# Altium PCB PCB1.PcbDoc
Units mm, origin at the board's own origin, x right, y up, seen from the top; angles counter-clockwise.
Board outline 84.45 x 34.67 mm, 4 copper layers (Top Layer (SIG), Layer 2 (GND), Layer 3 (PWR), Bottom Layer (SIG)), stack 0.603 mm thick; 34 components, 26 nets, 130 pads, 29 vias.
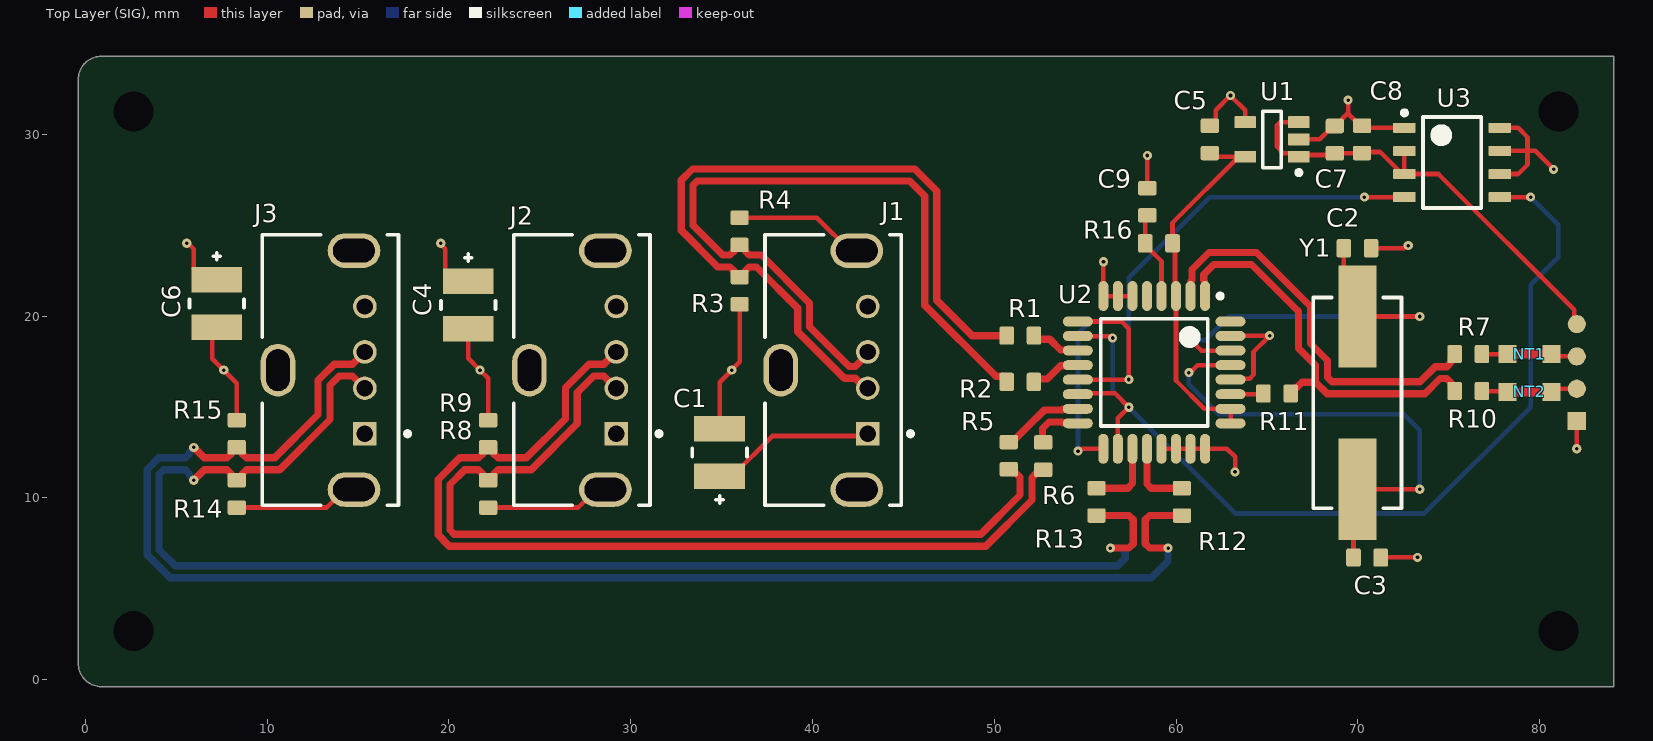
[diagram p0: Top Layer (SIG) view]
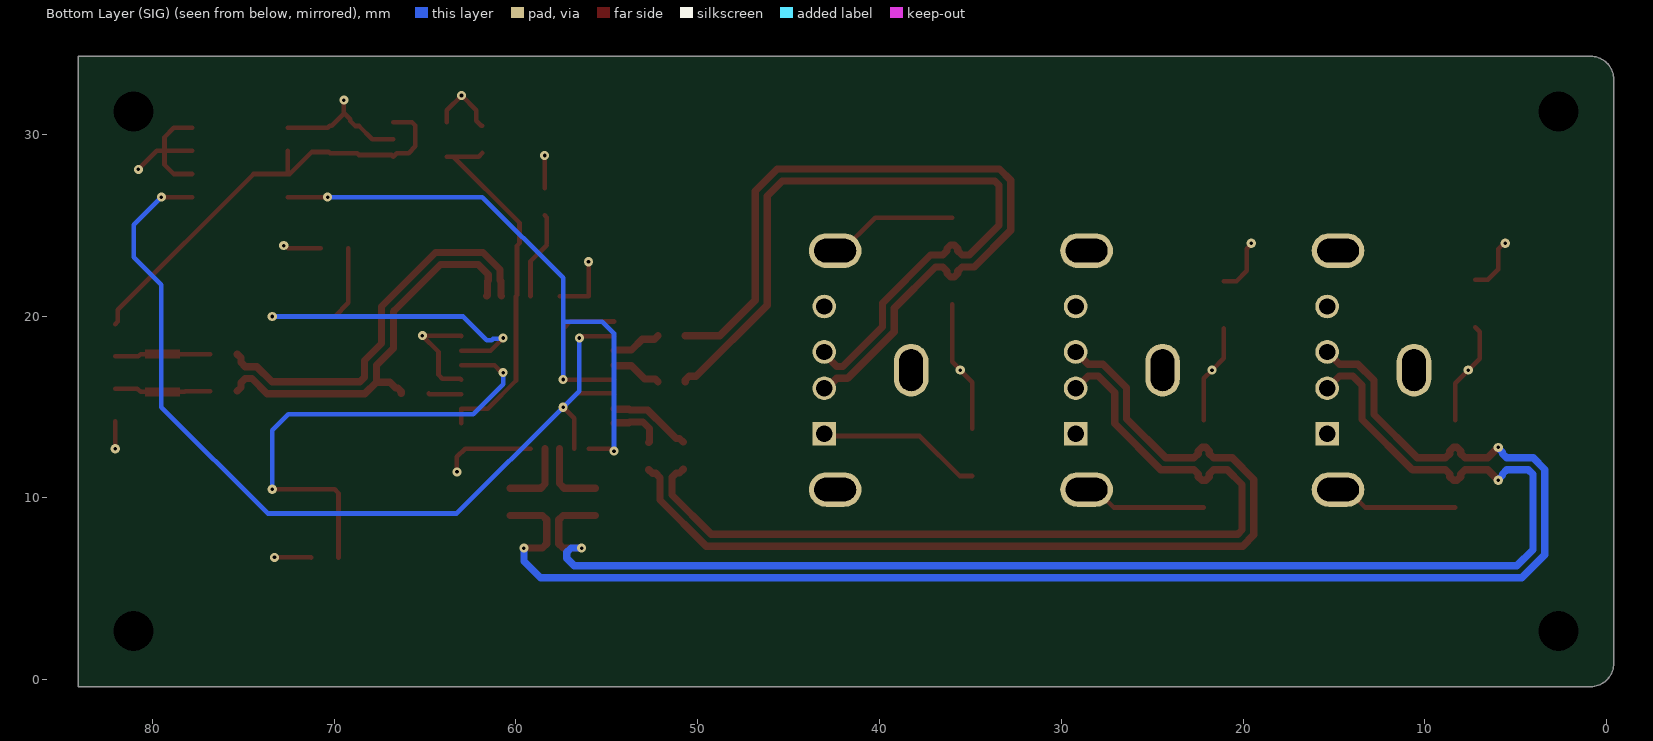
[diagram p1: Bottom Layer (SIG) view, seen from below]
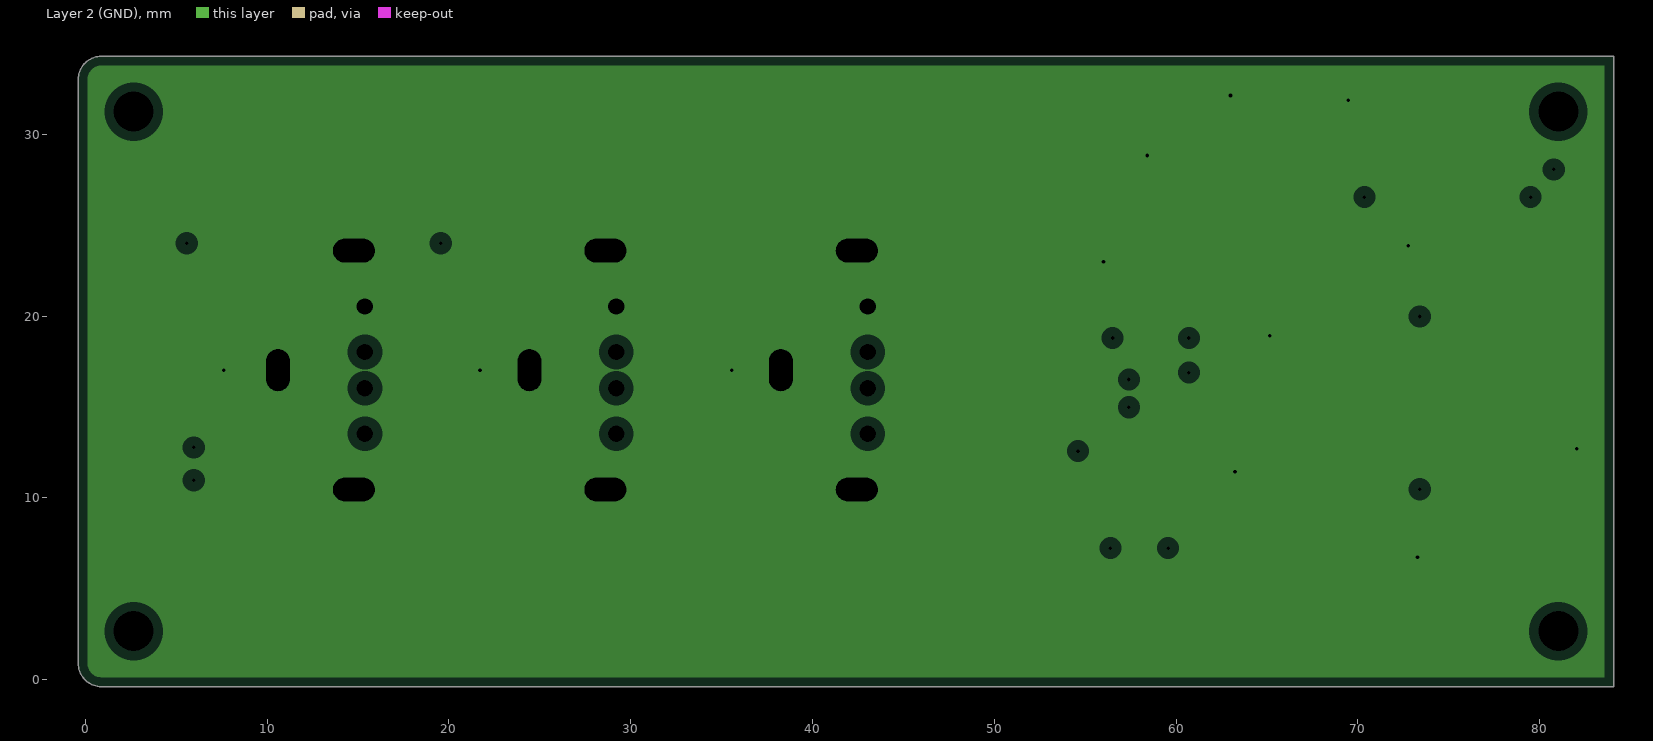
[diagram p2: Layer 2 (GND), clearances drawn from the general rule]
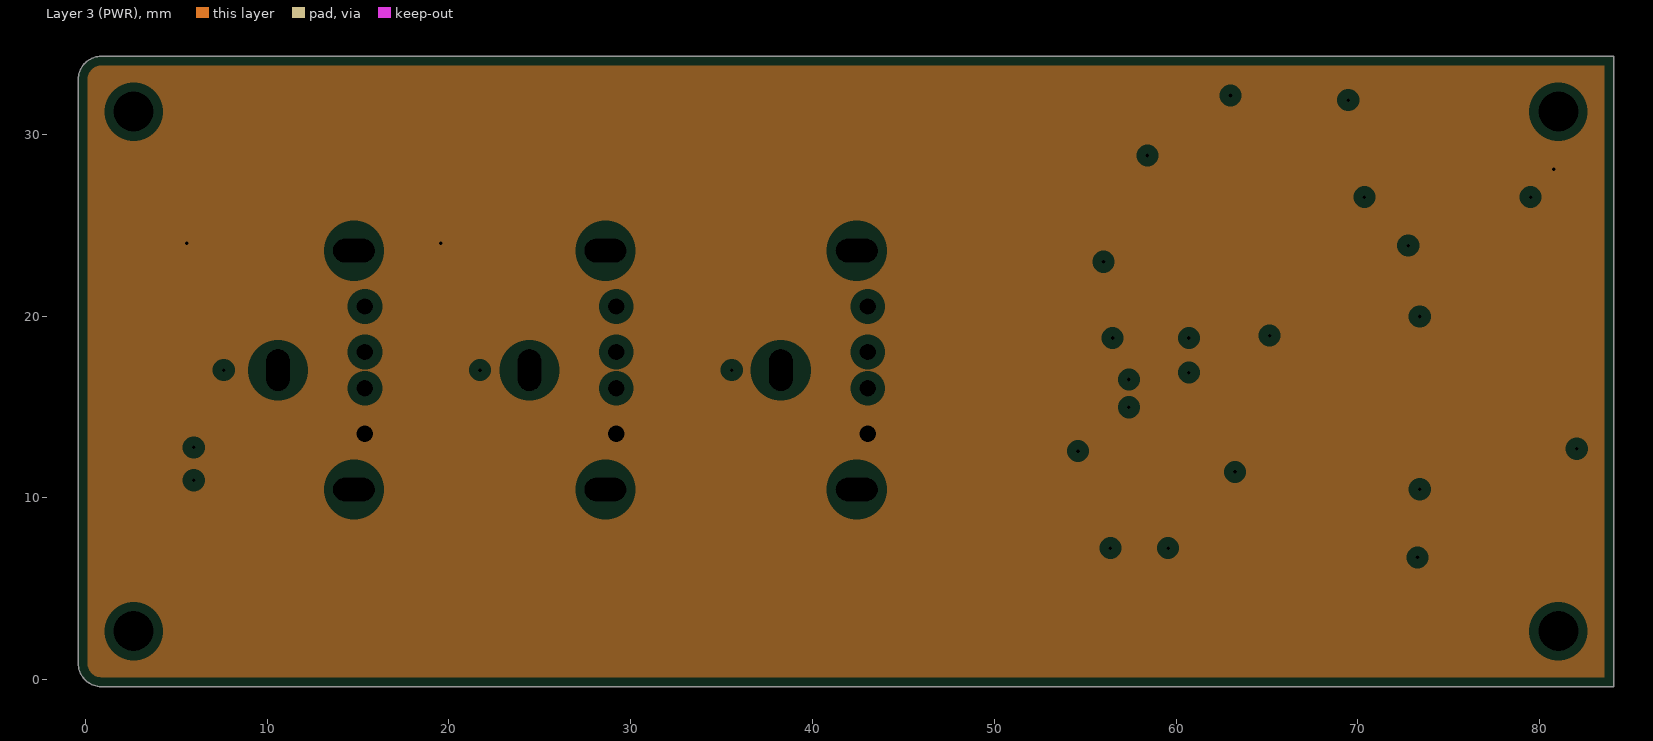
[diagram p3: Layer 3 (PWR), clearances drawn from the general rule]
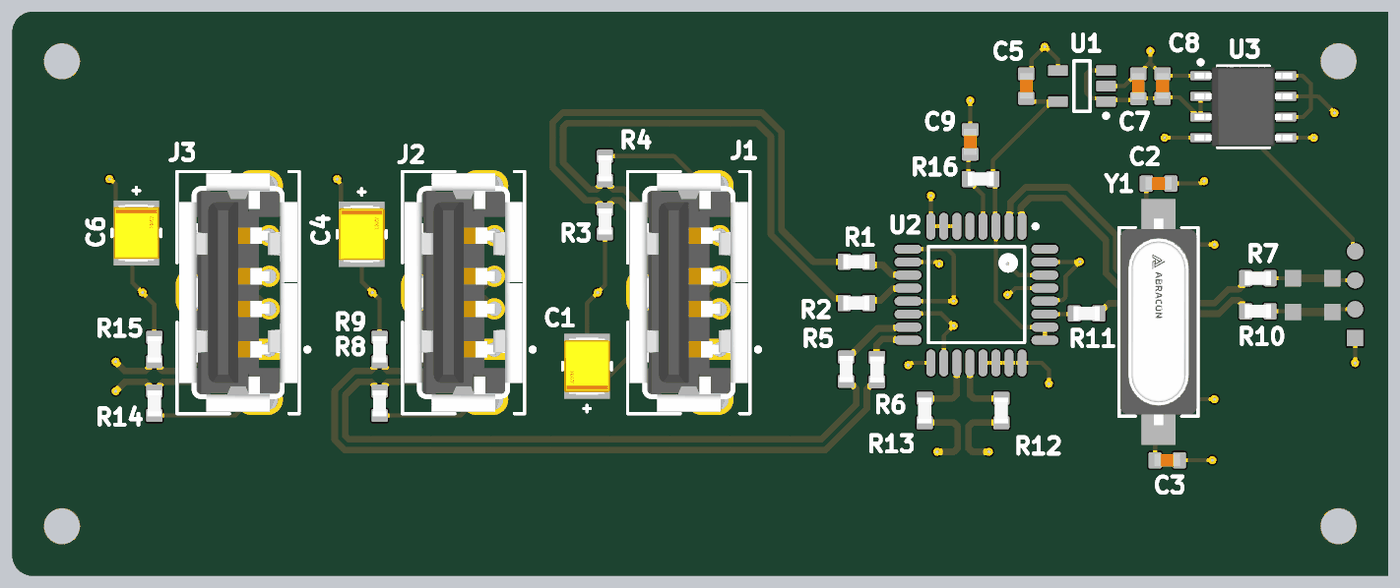
[diagram p4: 3D render of the assembled board from above, using the file's embedded part models]

## Layer stack, top to bottom
Top Solder: solder mask 0.0102, Solder Resist, Dk 3.5
Top Layer (SIG): signal copper 0.0356
Dielectric 2: prepreg 0.0711, PP-006, Dk 4.1
Layer 2 (GND): plane copper 0.035, net GND
Dielectric 1: dielectric 0.32, FR-4, Dk 4.8
Layer 3 (PWR): plane copper 0.035, net 5V_protected
Dielectric 3: prepreg 0.0711, PP-006, Dk 4.1
Bottom Layer (SIG): signal copper 0.0356
Bottom Solder: solder mask 0.0102, Solder Resist, Dk 3.5

## Board outline
-0.381,0.889 ccw(c0.889,0.889) 0.889,-0.381 84.074,-0.381 84.074,34.29 0.762,34.29 0.889,34.29 ccw(c0.889,33.02) -0.381,33.02

## Design rules (kind name [scope] priority, off if disabled: settings)
Clearance [All] p1: gap=0.254 ignorepadtopadclearanceinfootprint=TRUE
DiffPairsRouting [All] p1: maxlimit=0.4 minlimit=0.2 mostfreqgap=0.254 toplayer_minwidth=0.3 toplayer_maxwidth=0.6 toplayer_prefwidth=0.4 bottomlayer_minwidth=0.3 bottomlayer_maxwidth=0.6 bottomlayer_prefwidth=0.4 maxuncoupledlength=12.7
PlaneClearance [All] p1: clearance=0.508
PlaneConnect [All] p1: planeconnectstyle=Relief reliefexpansion=0.508 reliefentries=4 reliefconductorwidth=0.254 reliefairgap=0.254
PolygonConnect [All] p1: connectstyle=Relief reliefconductorwidth=0.254 reliefentries=4 polygonreliefangle="90 Angle" airgapwidth=0.254
RoutingVias [All] p1: holewidth=0.711 width=1.27 viastyle="Through Hole" minholewidth=0.711 minwidth=1.27 maxholewidth=0.711 maxwidth=1.27
SolderMaskExpansion [All] p1: expansion=0.102 istentingtop=FALSE
SupplyNets "Schematic Supply Nets_3" [InNet('5V_protected')] p1: voltage=0.000
SupplyNets "Schematic Supply Nets_2" [InNet('VCC_3V3')] p2: voltage=0.000
SupplyNets "Schematic Supply Nets_1" [InNet('+5')] p3: voltage=0.000
SupplyNets "Schematic Supply Nets" [InNet('GND')] p4: voltage=0.000
Width [All] p1: maxlimit=0.254 minlimit=0.254 preferedwidth=0.254
27 further rules are at their usual default settings.

## Classes and differential pairs
differential pair D31: +D31_P -D31_N
differential pair D21: +D21_P -D21_N
differential pair D11: +D11_P -D11_N
differential pair D3: +D3_P -D3_N
differential pair D2: +D2_P -D2_N
differential pair D1: +D1_P -D1_N
differential pair D0: +D0_P -D0_N

## Components (designator, comment, footprint, x,y, rotation, side; value= is the part's Value field where it differs from the comment)
C1 "100uF" FP-TPSB-MFG 34.898,12.502 r270 top
C2 "33pF" CAP_0603 69.977,23.73 r180 top
C3 "33pF" CAP_0603 70.51,6.718 r180 top
C4 "100uF" FP-TPSB-MFG 21.068,20.614 r90 top
C5 "4.7uF" CAP_0603 61.857,29.718 r270 top
C6 "100uF" FP-TPSB-MFG 7.238,20.692 r90 top
C7 "4.7uF" CAP_0603 68.734,29.705 r270 top
C8 "100nF" CAP_0603 70.231,29.718 r270 top
C9 "100nF" CAP_0603 58.42,26.289 r270 top
J1 "105057-0001" FP-105057-0001-MFG 41.144,17.027 r90 top
J2 "105057-0001" FP-105057-0001-MFG 27.314,17.027 r90 top
J3 "105057-0001" FP-105057-0001-MFG 13.484,17.027 r90 top
NT1 "NT" NETTIE_SMD 79.375,17.907 r0 top net-tie
NT2 "NT" NETTIE_SMD 79.375,15.827 r0 top net-tie
R1 "27" RES_0603 51.435,18.923 r0 top
R2 "27" RES_0603 51.435,16.383 r0 top
R3 "15k" RES_0603 35.997,21.396 r90 top
R4 "15k" RES_0603 35.997,24.661 r270 top
R5 "27" RES_0603 50.8,12.319 r90 top
R6 "27" RES_0603 52.694,12.299 r90 top
R7 "27" RES_0603 76.073,17.907 r0 top
R8 "15k" RES_0603 22.166,10.219 r90 top
R9 "15k" RES_0603 22.166,13.527 r270 top
R10 "27" RES_0603 76.073,15.875 r0 top
R11 "1.5k" RES_0603 65.555,15.742 r0 top
R12 "27" RES_0603 55.626,9.779 r90 top
R13 "27" RES_0603 60.325,9.779 r90 top
R14 "15k" RES_0603 8.336,10.219 r90 top
R15 "15k" RES_0603 8.336,13.527 r270 top
R16 "10k" RES_0603 59.055,24.003 r180 top
U1 "TLV70033DDCT" DDC0005A_M 65.278,29.718 r180 top
U2 "TUSB2036VFRG4" VF32_N 58.799,16.9 r270 top
U3 "TPS2041BDR" D0008A_L 75.184,28.448 r0 top
Y1 "6MHz Crystal" FP-ABLS2-MFG 69.977,15.224 r270 top

## Footprints (in the part's own frame and the unit in brackets; to place one, negate y for a bottom-side part, rotate by r counter-clockwise, add the part's x,y. Pads: shape width x height; smd on the part's side, far side on the other; paste and mask are expansions set on the pad)
CAP_0603 [mm]
  rrect25% 0.8x1 smd: 1(-0.75,0) 2(0.75,0)
  body extent -0.8,-0.4 0.8,0.4, height 0.51
D0008A_L [mm] "SOIC, 8-Leads, Body 5x4mm, Pitch 1.27mm, IPC High Density"
  rrect18% 1.25x0.55 smd: 1(-2.625,1.905) 2(-2.625,0.635) 3(-2.625,-0.635) 4(-2.625,-1.905) 5(2.625,-1.905) 6(2.625,-0.635) 7(2.625,0.635) 8(2.625,1.905)
  silkscreen extent -2.75,-2.5 1.6,2.85, body extent -3,-2.45 3,2.45, height 1.63
DDC0005A_M [mm] "SOT23, 5-Leads, Body 3.05x1.75mm, Pitch 0.95mm, IPC Low Density"
  rrect15% 1.2x0.65 smd: 1(-1.475,0.95) 2(-1.475,0) 3(-1.475,-0.95) 4(1.475,-0.95) 5(1.475,0.95)
  silkscreen extent -1.6,-1.55 0.5,1.95, body extent -0.88,-1.52 0.87,1.53, height 1.1
FP-105057-0001-MFG [mm]
  rect 1.3x1.3 hole 0.9 paste-2539.97 mask+0: 1(-3.5,-1.9)
  round 1.3 hole 0.9 paste-2539.97 mask+0: 2(-1,-1.9) 3(1,-1.9) 4(3.5,-1.9)
  rrect100% 2.9x1.9 hole 1.3 slot 2.3 at 0 deg paste-2539.97 mask+0: 5(0,2.88)
  rrect100% 1.9x2.9 hole 2.3 slot 1.3 at 0 deg paste-2539.97 mask+0: 6(-6.57,-1.3) 7(6.57,-1.3)
  silkscreen extent -7.44,-4.38 7.44,3.75, body extent -7.62,-3.85 7.62,3.93, height 0.25
FP-ABLS2-MFG [mm]
  rect 5.6x2.1 smd paste+0 mask+0: 1(-4.75,0) 2(4.75,0)
  silkscreen extent -5.8,-2.42 5.8,2.42, body extent -7.65,-2.52 7.65,2.52, height 0.25
FP-TPSB-MFG [mm]
  rect 1.4x2.8 smd paste+0 mask+0: 1(-1.3,0) 2(1.3,0)
  silkscreen extent -0.22,-1.5 2.8,1.5, body extent -2.1,-1.6 2.1,1.6, height 0.25
NETTIE_SMD [mm]
  rect 1x1 smd mask-10: 1(-1.143,0) 2(1.27,0)
  Top Layer (SIG) region: -0.889,-0.254 1.016,-0.254 1.016,0.254 -0.889,0.254
RES_0603 [mm]
  rrect25% 0.8x1 smd: 1(-0.75,0) 2(0.75,0)
  body extent -0.8,-0.43 0.8,0.43, height 0.52
VF32_N [mm] "Thin QFP, 32-Leads, Body 7x7mm, Pitch 0.8mm, IPC Medium Density"
  oval 1.65x0.55 smd: 1(-4.2,2.8) 2(-4.2,2) 3(-4.2,1.2) 4(-4.2,0.4) 5(-4.2,-0.4) 6(-4.2,-1.2) 7(-4.2,-2) 8(-4.2,-2.8) 17(4.2,-2.8) 18(4.2,-2) 19(4.2,-1.2) 20(4.2,-0.4) 21(4.2,0.4) 22(4.2,1.2) 23(4.2,2) 24(4.2,2.8)
  oval 0.55x1.65 smd: 9(-2.8,-4.2) 10(-2,-4.2) 11(-1.2,-4.2) 12(-0.4,-4.2) 13(0.4,-4.2) 14(1.2,-4.2) 15(2,-4.2) 16(2.8,-4.2) 25(2.8,4.2) 26(2,4.2) 27(1.2,4.2) 28(0.4,4.2) 29(-0.4,4.2) 30(-1.2,4.2) 31(-2,4.2) 32(-2.8,4.2)
  silkscreen extent -4.32,-2.95 2.95,3.75, body extent -3.5,-3.5 3.5,3.5, height 1.6

## Part data
C1 C4 C6: library part CMP-04424-000211-1, "CAP TANT 100UF 10% 6.3V 1411 TPSB107K006R0400", Case Code (Imperial)=1210, Case Code (Metric)=3528, Dielectric Material=Tantalum, ESR (Equivalent Series Resistance)=400mR, Leakage Current=6.3uA, Max Operating Temperature=125°C, Min Operating Temperature=-55°C, Package Quantity=1, Tolerance=10%, Voltage=6.3V, Capacitance=100uF, Case/Package=1210, Construction=Flat, Depth=2.8mm, Dissipation Factor=10%, Features="General Purpose", Height=1.9mm, Height - Seated (Max)=0.083inch, Lead Free="Lead Free", Length=3.5mm, Mount="Surface Mount", Packaging="Tape and Reel", Polarity=Polar, Radiation Hardening=No, REACH SVHC="No SVHC", RoHS Compliant=Yes, Series=TPS, Termination=SMD/SMT, Voltage Rating=6.3V, Voltage Rating (DC)=6.3V, Weight=0.000564oz, Width=0.11inch
C2 C3 C5 C7 C8 C9: library part CAP_0603, "Capacitor SMD 0603"
J1 J2 J3: library part CMP-04767-000006-1, "CONN RCPT USB2.0 TYPEA 4POS VERT", Current Rating=1.5A, Manufacturer=Molex, Temperature="-40°C to +85°C", Temperature Range High=+85°C, Temperature Range Low=-40°C, Voltage Rating=30V, Automotive=No, Category=Conn, ComponentLink2Description=Datasheet, ComponentLink2URL=https://www.molex.com/webdocs/datasheets/pdf/en-us/1050570001_IO_CONNECTORS.pdf, Conn Orientation=Vertical, Contact Material=Gold,Nickel, Device Class L1=Connectors, Device Class L2="USB Connectors", Device Class L3=unset, Digikey Description="CONN RCPT USB2.0 TYPEA 4POS VERT", Footprint Url=https://www.molex.com/pdm_docs/sd/1050570001_sd.pdf, Height=10.75mm, Is Female=yes, Lead Free=Yes, Manufacturer Part Number=105057-0001, Number Of Contacts=4, Octopart=https://octopart.com/105057-0001-molex-19914270, Package=105057-0001, RoHS=TRUE, Shielding=true, Usb Standard="USB 2.0"
NT1 NT2: library part NetTie_SMD, "Net tie smd"
R1 R2 R3 R4 R5 R6 R7 R8 R9 R10 R11 R12 R13 R14 R15 R16: library part RES_0603, "Resistor SMD 0603"
U1: library part CMP-0394-01055-2, "Single Output LDO, 200 mA, Fixed 3.3 V Output, 2 to 5.5 V Input, with Low IQ, 5-pin SOT (DDC), -40 to 125 degC, Green (RoHS & no Sb/Br)", Manufacturer="Texas Instruments", Accuracy(%)=2, Code_JEDEC=MO-193, ComponentLink1Description="Manufacturer URL", ComponentLink1URL=http://www.ti.com/, ComponentLink2Description=Datasheet, ComponentLink2URL=http://www.ti.com/general/docs/lit/getliterature.tsp?genericPartNumber=TLV70033&fileType=pdf, ComponentLink3Description="Package Specification", ComponentLink3URL=http://www.ti.com/litv/pdf/mpds123d, DatasheetVersion=SLVSA00D, Eco-Plan="Green (RoHS & no Sb/Br)", Fixed Output Options(V)=3.3, Iout(Max)(A)=0.2, Iq(Typ)(mA)=0.03, Mounting Technology="Surface Mount", PackageDescription="5-Pin Plastic Small Outline, Body 2.9 x 1.6 mm, 0.95 mm Pitch", PackageReference=DDC0005A, PackageVersion=4204403-2/E, PartNumber=TLV70033DDCT, SubFamily="Single Channel LDO", Vdo(Typ)(mV)=175, Vin(Max)(V)=5.5, Vin(Min)(V)=2, Vout Adj(Max)(V)=3.3, Vout Adj(Min)(V)=3.3
U2: library part CMP-0309-00080-1, "2 / 3-Port Hub for USB with Optional Serial EEPROM Interface, 3.3V, 0 to 70 degC, 32-Pin LQFP (VF), Green (RoHS & no Sb/Br)", Manufacturer="Texas Instruments", Supply Voltage(s)(V)=3.3, ComponentLink1Description=Datasheet, ComponentLink1URL=http://www.ti.com/general/docs/lit/getliterature.tsp?genericPartNumber=TUSB2036&fileType=pdf, ComponentLink2Description="Package Specification", ComponentLink2URL=http://www.ti.com/litv/pdf/mtqf002b, DatasheetVersion=SLLS372E, Eco-Plan="Green (RoHS & no Sb/Br)", Integrated MCU Architecture=N/A, Mounting Technology="Surface Mount", PackageDescription="32-Pin Plastic Quad Flatpack, 7 x 7 mm Body, 0.8 mm Pitch", PackageReference=VF32, PackageVersion="revD, Apr-2000", PartNumber=TUSB2036VFRG4, SubFamily="USB Hub Controller", USB Full Speed=True, USB Speed=Full
U3: library part CMP-0337-00094-2, "Single-Channel Current-Limited Power Distribution Switch, 1 A Current Limit, -40 to 85 degC, 8-pin SOIC (D), Green (RoHS & no Sb/Br)", Continuous Current(Max)(A)=0.5, Current Limit(A)=1, Manufacturer="Texas Instruments", Rating=Catalog, Code_JEDEC=MS-012AA, ComponentLink1Description=Datasheet, ComponentLink1URL=http://www.ti.com/general/docs/lit/getliterature.tsp?genericPartNumber=TPS2041B&fileType=pdf, DatasheetVersion=SLVS514L, Eco-Plan="Green (RoHS & no Sb/Br)", Enable="Active Low", Mounting Technology="Surface Mount", NEMKO=TRUE, Number of Switches=1, PackageDescription="8-Pin Plastic Small Outline Integrated Circuit, 4.9 x 3.9 mm, Pitch 1.27 mm Pitch", PackageReference=D0008A, PackageVersion="revM, Jun-2011", PartNumber=TPS2041BDR, rDS(on) per FET(Typ)(mOhms)=70, UL Listed=TRUE, Vin(Max)(V)=5.5, Vin(Min)(V)=2.7
Y1: library part CMP-27762-000920-1, "CRYSTAL 6.0000MHZ 18PF SMD ABLS2-6.000MHZ-D4Y-T", ESR (Equivalent Series Resistance)=100R, Frequency=6MHz, Frequency Stability=30ppm, Load Capacitance=18pF, Max Operating Temperature=85°C, Min Operating Temperature=-40°C, Operating Frequency="6 MHz", Package Quantity=1000, Depth=4.7mm, Frequency Tolerance=30ppm, Height=0.13inch, Lead Free="Lead Free", Length=11.4mm, Mount="Surface Mount", Number of Pins=2, Packaging="Tape and Reel", Series=ABLS2, Series Resistance=100R, Termination=SMD/SMT, Tolerance=30ppm, Width=4.7mm

## Free pads (board coordinates)
  round 1 smd: 1(82.042,19.558) 2(82.042,17.78) 3(82.042,16.002)
  rect 1x1 smd: 4(82.042,14.224)
  round 1 hole 2.2: 5(2.667,31.242) 6(2.667,2.667) 7(81.026,2.667) 8(81.026,31.242)

## Via types
v1: diameter 0.5, hole 0.2, Top Layer (SIG) to Bottom Layer (SIG), 29 vias

## Nets (pads, with @x,y where several pads share a name; then routed paths per layer and width w, separated by ;. In a path a pad name is that pad's centre, name@x,y a point inside that pad or via, vN(x,y) a via of type N, cw(c..) or ccw(c..) an arc to the next point about the centre after c; other vN are vias at no path point)
5V_protected: C1.2 C4.2 C6.2 J1.1 J2.1 J3.1 U3.6 U3.7 U3.8 | length 23.8
  Top Layer (SIG) w0.254: v1@5.588,24.13 5.588,24.063 5.965,23.687 5.965,22.565 6.538,21.992 C6.2 ; v1(19.558,24.003) 19.558,23.936 19.795,23.699 19.795,22.487 20.368,21.914 C4.2 ; C1.2 35.598,11.202 37.797,13.4 J1.1@43.044,13.4 ; U3.6 78.815,27.813 79.333,28.331 79.333,29.083 ; U3.7 79.333,29.083 ; U3.8 78.815,30.353 79.333,29.835 79.333,29.083 ; v1(80.772,28.067) 79.756,29.083 79.333,29.083
  other v1: 5.588,24.003
+5: C7.2 C8.2 pad.1 U1.1 U1.3 U3.2 U3.3 | length 24.9
  Top Layer (SIG) w0.254: U1.3 65.72,30.668 65.532,30.48 65.532,29.337 65.903,28.966 66.555,28.966 U1.1 66.847,28.862 68.64,28.862 C7.2 68.74,28.962 70.225,28.962 C8.2 70.289,29.025 71.239,29.025 72.451,27.813 U3.3 ; U3.2 U3.3 ; pad.1 81.899,19.701 81.899,20.347 74.433,27.813 U3.3
D0_N: R7.1 U2.2 | length 21.8
  Top Layer (SIG) w0.4: U2.2 60.828,21.129 60.828,21.91 60.872,21.954 60.872,22.557 61.81,23.495 64.425,23.495 67.391,20.528 67.391,18.496 68.326,17.562 68.326,16.637 68.58,16.383 73.417,16.383 74.252,17.218 74.889,17.218 75.123,17.452 75.123,17.707 R7.1
D0_P: R10.1 R11.2 U2.1 | length 22.4
  Top Layer (SIG) w0.4: U2.1 61.57,21.129 61.57,21.91 61.526,21.954 61.526,22.286 62.081,22.841 64.154,22.841 66.548,20.447 66.737,20.258 66.737,18.226 67.672,17.291 67.672,16.366 ; R11.2 66.305,15.842 66.505,16.042 66.605,16.042 66.929,16.366 67.672,16.366 ; R10.1 75.123,16.075 75.123,16.33 74.889,16.564 74.523,16.564 73.688,15.729 68.309,15.729 67.672,16.366
D1_N: R1.2 U2.11 | length 2.8
  Top Layer (SIG) w0.4: R1.2 52.385,18.723 53.05,18.723 53.643,18.129 54.57,18.129 U2.11
D1_P: R2.2 U2.12 | length 2.8
  Top Layer (SIG) w0.4: R2.2 52.345,16.543 52.915,16.543 53.643,17.272 54.57,17.272 U2.12
D2_N: R5.2 U2.15 | length 4.6
  Top Layer (SIG) w0.4: R5.2 51,13.269 51.185,13.269 51.751,13.835 52.744,14.827 53.745,14.827 53.789,14.872 54.57,14.872 U2.15
D2_P: R6.2 U2.16 | length 2.9
  Top Layer (SIG) w0.4: R6.2 52.656,13.086 52.656,13.814 53.015,14.173 53.745,14.173 53.789,14.129 54.57,14.129 U2.16
D3_N: R12.2 U2.19 | length 4
  Top Layer (SIG) w0.4: R12.2 57.341,10.529 57.599,10.787 U2.19
D3_P: R13.2 U2.20 | length 4
  Top Layer (SIG) w0.4: U2.20 58.399,10.763 58.633,10.529 R13.2
D11_N: J1.2 R1.1 R3.2 | length 43.4
  Top Layer (SIG) w0.4: R3.2 35.897,22.146 35.697,22.346 35.697,22.467 35.462,22.702 34.798,22.702 32.781,24.719 32.781,27.469 33.398,28.086 45.63,28.086 46.836,26.88 46.836,20.873 48.786,18.923 R1.1 ; R3.2@36.097,22.146 36.297,22.346 36.297,22.467 36.531,22.702 36.925,22.702 39.19,20.437 39.19,19.142 41.758,16.573 42.36,16.573 43.033,15.9 J1.2@43.044,15.9
D11_P: J1.3 R2.1 R4.2 | length 42.1
  Top Layer (SIG) w0.4: R4.2 35.897,23.911 35.697,23.711 35.697,23.59 35.462,23.356 35.069,23.356 33.435,24.99 33.435,27.198 33.669,27.432 45.359,27.432 46.182,26.609 46.182,20.602 50.101,16.683 50.485,16.683 50.685,16.483 R2.1 ; R4.2@36.097,23.911 36.297,23.711 36.297,23.59 36.531,23.356 37.196,23.356 39.844,20.708 39.844,19.413 42.029,17.227 42.36,17.227 43.033,17.9 J1.3@43.044,17.9
D21_N: J2.2 R5.1 R8.2 | length 50.2
  Top Layer (SIG) w0.4: J2.2 29.203,16.027 28.53,16.7 27.977,16.7 27.07,15.793 27.07,14.088 24.528,11.546 23.303,11.546 22.701,11.546 22.466,11.312 22.466,11.169 22.266,10.969 R8.2 22.066,10.969 21.866,11.169 21.866,11.312 21.632,11.546 20.877,11.546 20.066,10.735 20.066,8.235 20.3,8.001 49.261,8.001 51.42,10.16 51.42,11.135 51.185,11.369 51,11.369 R5.1
D21_P: J2.3 R6.1 R9.2 | length 53.4
  Top Layer (SIG) w0.4: J2.3 29.203,18.027 28.53,17.354 27.706,17.354 26.416,16.064 26.416,14.359 24.257,12.2 23.032,12.2 22.701,12.2 22.466,12.435 22.466,12.577 22.266,12.777 R9.2 22.066,12.777 21.866,12.577 21.866,12.435 21.632,12.2 20.607,12.2 19.412,11.006 19.412,7.964 20.029,7.347 49.532,7.347 52.074,9.889 52.074,11.114 52.308,11.349 52.494,11.349 R6.1
D31_N: J3.2 R12.1 R14.2 | length 79.9
  Top Layer (SIG) w0.4: v1(5.969,10.969) 6.546,11.546 7.802,11.546 8.036,11.312 8.036,11.169 8.236,10.969 R14.2 ; R14.2@8.436,10.969 8.636,11.169 8.636,11.312 8.87,11.546 10.693,11.546 13.462,14.315 13.462,16.192 13.97,16.7 14.699,16.7 15.372,16.027 J3.2 ; R12.1 57.414,9.029 57.649,8.795 57.649,7.473 57.414,7.239 v1(56.388,7.239)
  Bottom Layer (SIG) w0.4: v1(5.969,10.969) 5.969,10.996 5.735,11.231 5.735,11.312 5.5,11.546 4.898,11.546 4.318,11.546 4.064,11.292 4.064,7.15 4.952,6.262 56.793,6.262 57.204,6.673 57.204,7.005 56.97,7.239 v1(56.388,7.239)
D31_P: J3.3 R13.1 R15.2 | length 84.1
  Top Layer (SIG) w0.4: v1(5.969,12.777) 6.546,12.2 7.802,12.2 8.036,12.435 8.036,12.577 8.236,12.777 R15.2 ; R15.2@8.436,12.777 8.636,12.577 8.636,12.435 8.87,12.2 10.422,12.2 12.808,14.586 12.808,16.463 13.699,17.354 14.699,17.354 15.372,18.027 J3.3 ; v1(59.563,7.239) 58.537,7.239 58.302,7.473 58.302,8.795 58.537,9.029 R13.1
  Bottom Layer (SIG) w0.4: v1(5.969,12.777) 5.969,12.75 5.735,12.516 5.735,12.435 5.5,12.2 5.169,12.2 4.047,12.2 3.41,11.563 3.41,6.879 4.681,5.608 57.064,5.608 58.654,5.608 59.563,6.517 v1(59.563,7.239)
GND: C1.1 C2.1 C3.1 C4.1 C5.1 C6.1 C7.1 C8.1 C9.1 J1.4 J1.5 J1.6 J1.7 J2.4 J2.5 J2.6 J2.7 J3.4 J3.5 J3.6 J3.7 pad.4 R3.1 R4.1 R8.1 R9.1 R14.1 R15.1 U1.2 U1.4 U2.6 U2.7 U2.8 U2.21 U2.22 U2.23 U2.24 U2.28 U2.31 U3.1 | length 73.1
  Top Layer (SIG) w0.254: C6.1 6.985,19.139 6.985,17.662 8.336,16.311 R15.1 ; R14.1 13.295,9.469 14.284,10.457 J3.6 ; C4.1 21.068,17.676 v1(21.717,17.027) 22.166,16.578 R9.1 ; R8.1 27.126,9.469 28.114,10.457 J2.6 ; C1.1 34.898,16.366 v1(35.56,17.027) 35.56,17.046 35.997,17.483 R3.1 ; R4.1 40.248,25.411 42.189,23.47 J1.7@42.444,23.47 ; v1(56.007,22.987) 56.003,22.983 56.003,21.104 U2.8 U2.7 U2.6 ; C9.1 v1(58.42,28.829) ; U2.21 U2.22 U2.23 U2.24 62.798,12.7 63.246,12.252 v1(63.246,11.43) ; C5.1 61.904,30.468 62.177,30.741 62.177,31.316 v1(62.992,32.131) 63.803,31.32 U1.4 ; U2.28 63.056,16.557 64.055,16.557 64.262,16.764 64.262,18.034 v1(65.151,18.923) 65.14,18.912 63.01,18.912 U2.31 ; U1.2 67.896,29.718 68.634,30.455 C7.1 68.834,30.455 69.107,30.728 69.107,30.828 69.469,31.191 ; v1(69.469,31.877) 69.469,31.191 ; C2.1 72.558,23.73 72.704,23.876 v1(72.771,23.876) ; C3.1 71.272,6.731 v1(73.279,6.731) ; U3.1 70.346,30.353 C8.1 70.131,30.468 69.469,31.13 69.469,31.191 ; v1(82.042,12.7) pad.4
  other v1: 7.62,17.027
NetNT1_1: NT1.1 NT1.2 pad.2 R7.2 | length 5.3
  Top Layer (SIG) w0.254: R7.2 NT1.1 NT1.2 80.772,17.78 pad.2
NetNT2_1: NT2.1 NT2.2 pad.3 R10.2 | length 5.3
  Top Layer (SIG) w0.254: R10.2 78.184,15.875 NT2.1 NT2.2 80.82,16.002 pad.3
NetR11_1: R11.1 U2.27 | length 1.8
  Top Layer (SIG) w0.254: U2.27 64.763,15.7 R11.1
NetU2_9: U2.9 U2.13 U2.17 U3.4 | length 42.1
  Top Layer (SIG) w0.254: U2.13 54.604,16.505 57.399,16.505 v1(57.404,16.51) 57.404,19.304 57.008,19.7 U2.9 ; v1(54.61,12.573) 54.677,12.573 54.804,12.7 U2.17 ; v1(70.358,26.543) U3.4
  Bottom Layer (SIG) w0.254: v1(54.61,12.573) 54.61,19.05 55.245,19.685 57.404,19.685 ; v1(57.404,16.51) 57.404,19.685 ; v1(70.358,26.543) 61.849,26.543 57.404,22.098 57.404,19.685
NetU2_10: U2.10 U2.14 U2.18 U3.5 | length 53.3
  Top Layer (SIG) w0.254: U2.14 54.647,15.748 56.642,15.748 v1(57.404,14.986) 56.799,14.381 U2.18 ; U2.10 56.344,18.9 56.448,18.796 v1(56.515,18.796) ; U3.5 v1(79.502,26.543)
  Bottom Layer (SIG) w0.254: v1(56.515,18.796) 56.515,15.875 v1(57.404,14.986) 63.246,9.144 73.66,9.144 79.502,14.986 79.502,21.717 81.026,23.241 81.026,25.019 v1(79.502,26.543)
Reset: C9.2 R16.2 U2.4 | length 4.8
  Top Layer (SIG) w0.254: R16.2@58.305,23.903 59.199,23.009 U2.4 ; R16.2 58.305,25.424 C9.2
VCC_3V3: C5.2 R16.1 U1.5 U2.3 U2.25 U2.26 | length 20.4
  Top Layer (SIG) w0.254: C5.2 62.057,28.768 U1.5@63.439,28.768 ; U2.25 U2.26 61.554,14.9 59.999,16.455 U2.3 59.942,21.157 59.942,23.866 R16.1 59.805,25.134 U1.5@63.439,28.768 ; U1.5 U1.5@63.439,28.768
XTAL1: C2.2 U2.30 Y1.1 | length 23.4
  Top Layer (SIG) w0.254: v1(60.706,18.796) 61.402,18.1 U2.30 ; C2.2 69.227,20.724 Y1.1 v1(73.406,19.974)
  Bottom Layer (SIG) w0.254: v1(60.706,18.796) 60.753,18.749 61.261,18.749 61.341,18.669 61.595,18.669 62.9,19.974 v1(73.406,19.974)
XTAL2: C3.2 U2.29 Y1.2 | length 27.4
  Top Layer (SIG) w0.254: v1(60.706,16.891) 60.773,16.891 61.182,17.3 U2.29 ; C3.2 69.76,10.257 Y1.2 v1(73.406,10.474)
  Bottom Layer (SIG) w0.254: v1(60.706,16.891) 60.706,16.256 62.357,14.605 72.517,14.605 73.406,13.716 v1(73.406,10.474)
pads on no net: U2.5 U2.32

## Polygon pours and split planes (outlines as drawn)
GND on Layer 2 (GND) (split plane): 83.564,33.78 83.564,0.129 0.889,0.129 0.876,0.128 0.77,0.137 0.654,0.164 0.543,0.21 0.441,0.273 0.35,0.35 0.273,0.441 0.21,0.543 0.164,0.654 0.137,0.77 0.128,0.876 0.129,0.889 0.129,33.02 0.128,33.033 0.137,33.139 0.164,33.255 0.21,33.366 0.273,33.468 0.35,33.559 0.441,33.636 0.543,33.699 0.654,33.745 0.77,33.772 0.86,33.78 0.889,33.78
5V_protected on Layer 3 (PWR) (split plane): 83.564,33.78 83.564,0.129 0.889,0.129 0.876,0.128 0.77,0.137 0.654,0.164 0.543,0.21 0.441,0.273 0.35,0.35 0.273,0.441 0.21,0.543 0.164,0.654 0.137,0.77 0.128,0.876 0.129,0.889 0.129,33.02 0.128,33.033 0.137,33.139 0.164,33.255 0.21,33.366 0.273,33.468 0.35,33.559 0.441,33.636 0.543,33.699 0.654,33.745 0.77,33.772 0.86,33.78 0.889,33.78

## Silkscreen, mask and mechanical layers (free items; w line width, h text height)
Mechanical 1:
  lines w0.254: 0.762,34.29 84.074,34.29 84.074,-0.381 0.889,-0.381 cw(c0.889,0.889) -0.381,0.889 -0.381,33.02 cw(c0.889,33.02) 0.889,34.29